# Altium PCB fairy_lights_button.PcbDoc
Units mil, origin at the board's own origin, x right, y up, seen from the top; angles counter-clockwise.
Board outline 800 x 1400 mil, 2 copper layers (L1, L2), stack 62.8 mil thick; 22 components, 13 nets, 52 pads, 27 vias.
Unrouted connection lines stored in the file: 1.
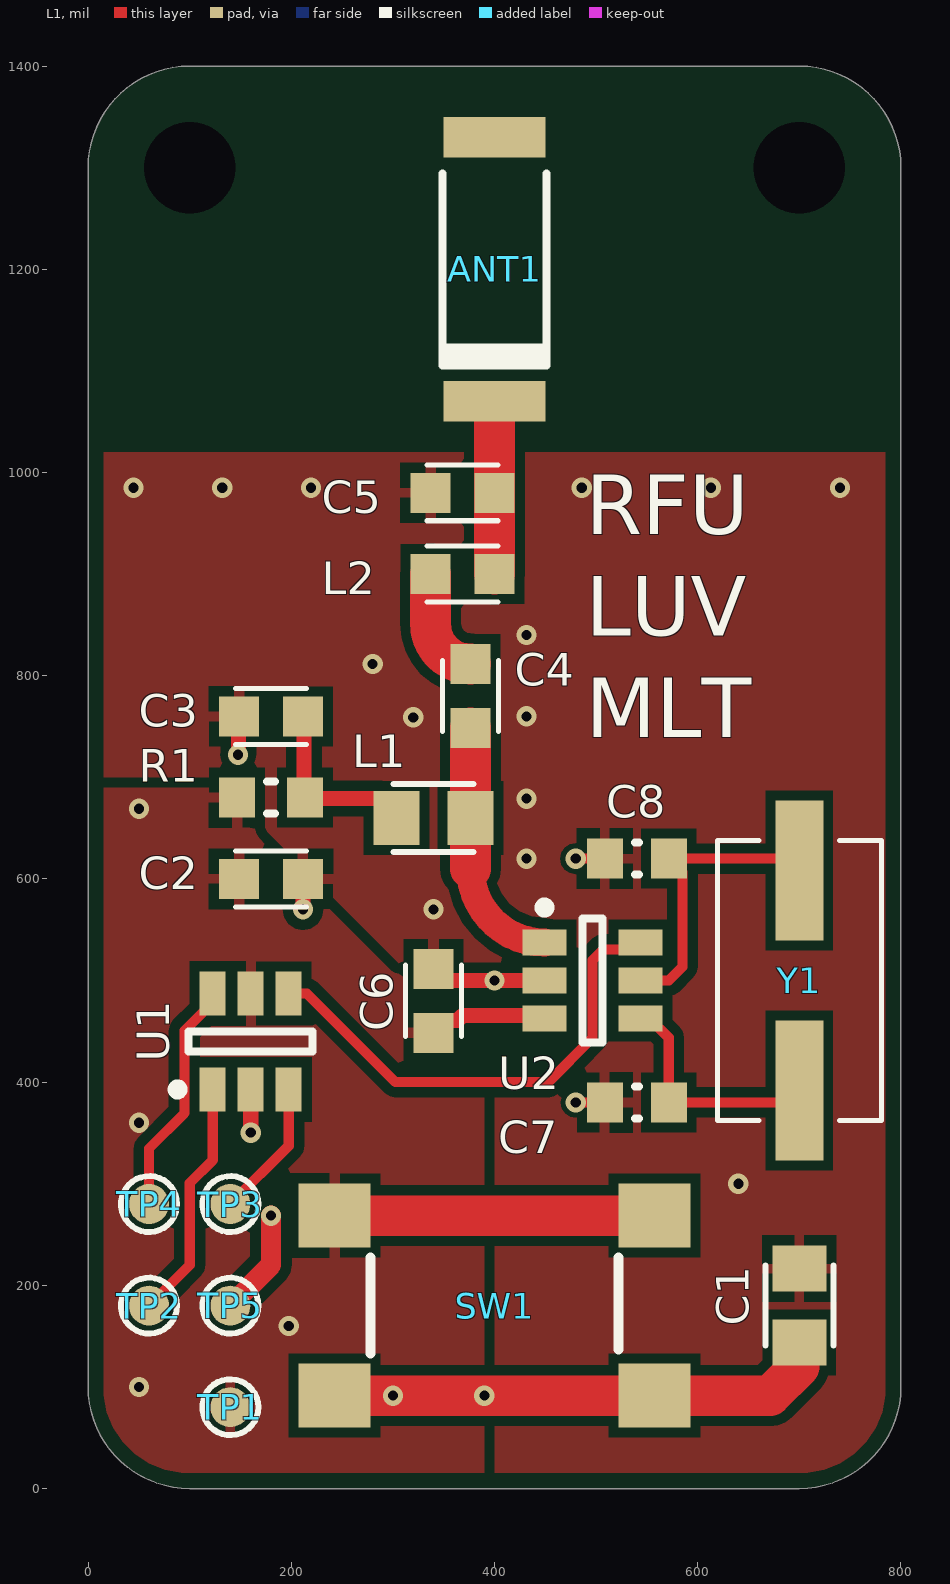
[diagram p0: L1 view]
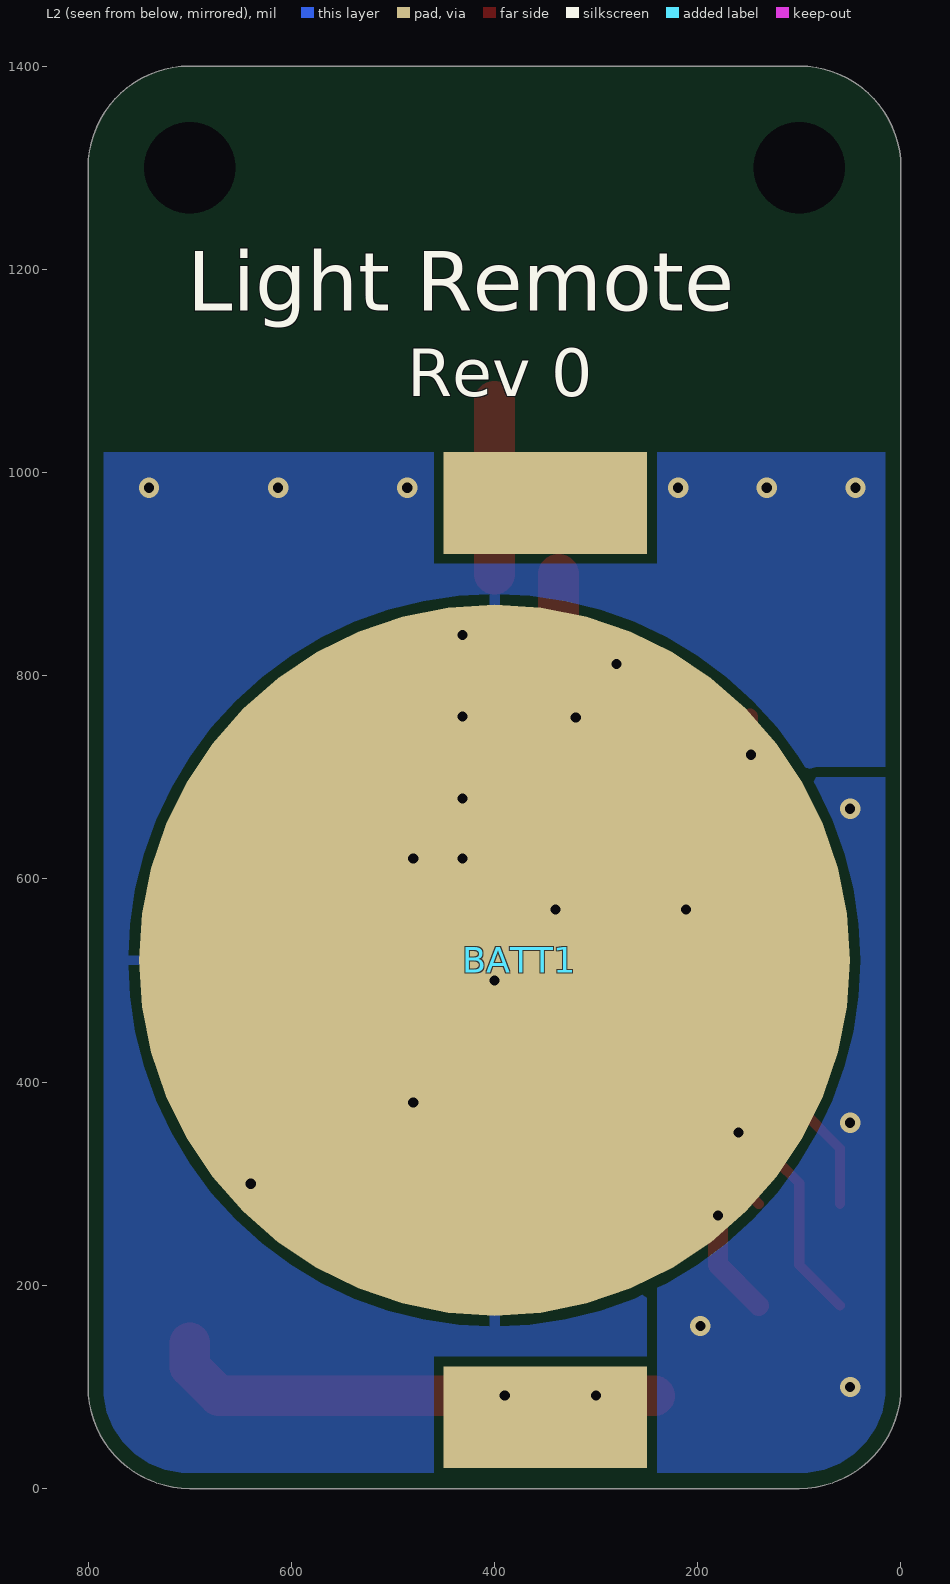
[diagram p1: L2 view, seen from below]
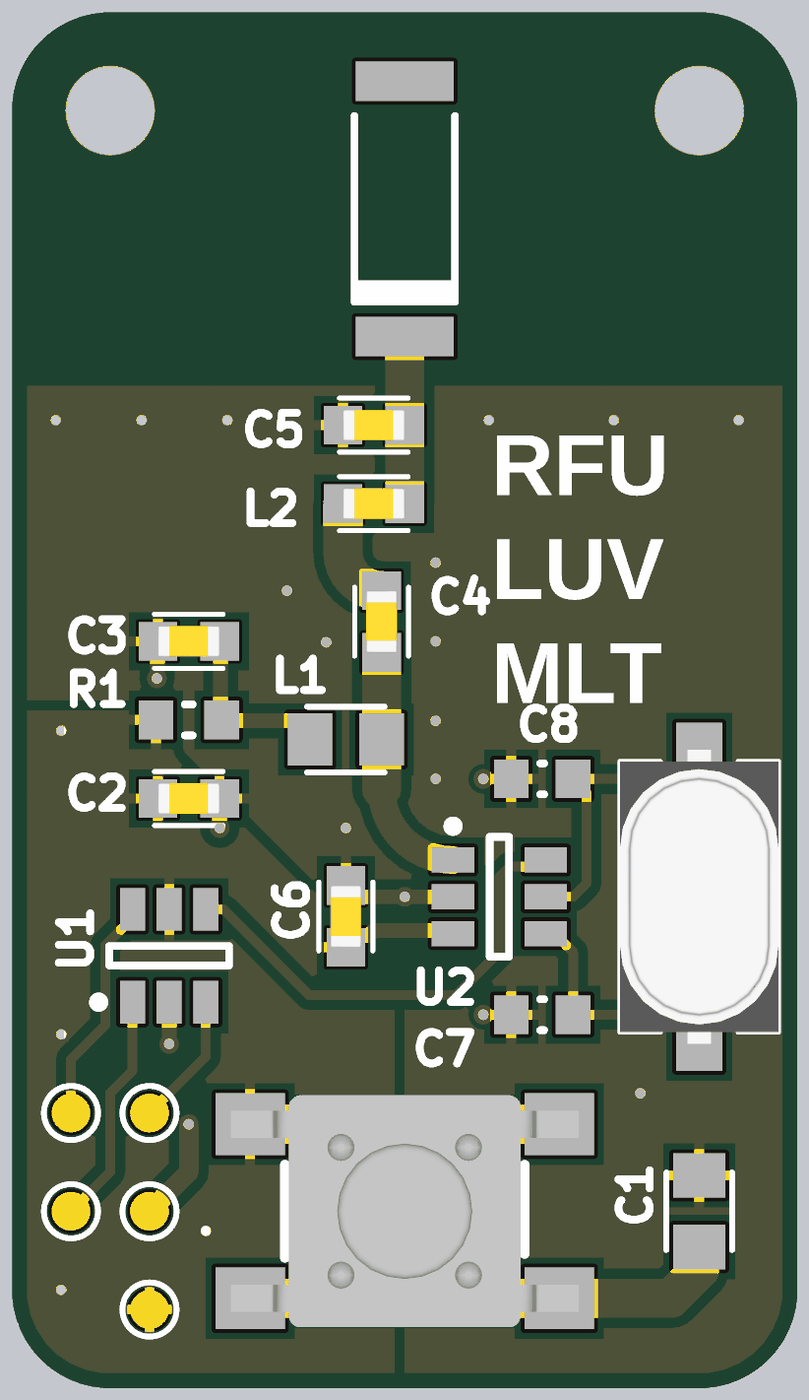
[diagram p2: 3D render of the assembled board from above, using the file's embedded part models]

## Layer stack, top to bottom
Top Solder: solder mask 0.1, Solder Resist, Dk 1
L1: signal copper 1.4
Core: dielectric 60, FR-4, Dk 4.6
L2: signal copper 1.4
Bottom Solder: solder mask 0.1, Solder Resist, Dk 1

## Board outline
100,0 cw(c100,100) 0,100 0,1300 cw(c100,1300) 100,1400 700,1400 cw(c700,1300) 800,1300 800,100 cw(c700,100) 700,0

## Design rules (kind name [scope] priority, off if disabled: settings)
BoardOutlineClearance [All] p1: gap=15 ignorepadtopadclearanceinfootprint=FALSE
Clearance [All] p1: gap=10 ignorepadtopadclearanceinfootprint=FALSE except(0: Arc-Hole Track-Hole SMDPad-Hole THPad-Hole Via-Hole Fill-Hole Poly-Hole Region-Hole Text-Hole)
PolygonConnect PolygonConnect_Via [All vs isVia] p1: connectstyle=Direct reliefconductorwidth=10 reliefentries=4 polygonreliefangle="90 Angle" airgapwidth=10
PolygonConnect [All] p2: connectstyle=Relief reliefconductorwidth=10 reliefentries=4 polygonreliefangle="90 Angle" airgapwidth=10
RoutingVias [All] p1: holewidth=10 width=20 viastyle="Through Hole" minholewidth=10 minwidth=20 maxholewidth=28 maxwidth=50
SolderMaskExpansion [All] p1: expansion=4
Width [All] p1: maxlimit=100 minlimit=10 preferedwidth=10 minimp=50.000000 maximp=50.000000 favimp=50.000000
30 further rules are at their usual default settings.

## Components (designator, comment, footprint, x,y, rotation, side; value= is the part's Value field where it differs from the comment)
ANT1 "CHIP ANTENNA" ANT-2.4-CHP 400,1200 r90 top locked
BATT1 "BAT-HLD-001" BAT-HLD-001_BAT-HLD-001(Primary) 350,520 r270 bottom locked
C1 "10uF" CAP_0805 700,180 r90 top
C2 "100nF" CAP_0603 180,600 r0 top
C3 "4.7uF" CAP_0603 180,760 r0 top
C4 "12pF" CAP_0603 376.42,780 r90 top
C5 "4.7pF" CAP_0603 368.5,980 r180 top
C6 "100nF" CAP_0603 340,480 r90 top
C7 "18pF" CAPC0603(1608)100_N 540,380 r180 top
C8 "18pF" CAPC0603(1608)100_N 540,620 r180 top
L1 "LQW21HNR82J00L" CAP_0805 340,660 r180 top
L2 "LQW18AN68NJ00D" CAP_0603 368.5,900 r0 top
R1 "0" RES_0603 180,680 r180 top
SW1 "PTS645SK50SMTR92 LFS" SWITCH_TACTILE_6MM 400,180 r180 top locked
TP1 "TESTPOINT" PAD_40MIL 140,80 r0 top
TP2 "TESTPOINT" PAD_40MIL 60,180 r90 top
TP3 "TESTPOINT" PAD_40MIL 140,280 r90 top
TP4 "TESTPOINT" PAD_40MIL 60,280 r90 top
TP5 "TESTPOINT" PAD_40MIL 140,180 r90 top
U1 "PIC10F202T-E/OT" SOT-23-OT6_N 160,440 r90 top
U2 "MICRF113YM6-TR" SOT-23-OT6_N 496.42,500 r0 top
Y1 "ECS-135.6-20-3X-TR" XTAL_ECS-135.6-20-3X-TR 700,500 r90 top

## Footprints (in the part's own frame and the unit in brackets; to place one, negate y for a bottom-side part, rotate by r counter-clockwise, add the part's x,y. Pads: shape width x height; smd on the part's side, far side on the other; paste and mask are expansions set on the pad)
ANT-2.4-CHP [mil] "SM Antenna, 2-Lead, Body 6.5x2.2x1.0mm"
  rect 40x100 smd: 1(-130,0) 2(130,0)
  silkscreen extent -94,-51 94,51, body extent -130,-45 130,45, height 40
BAT-HLD-001_BAT-HLD-001(Primary) [mil]
  round 700 smd: NEG(0,-50)
  rect 100x200 smd: POS1(-450,0) POS2(450,0)
  body extent -450,-305 450,305, height 170
CAP_0603 [mm]
  rect 1x1 smd mask+0.076: 1(-0.8,0) 2(0.8,0)
  silkscreen extent -0.89,-0.7 0.89,0.7, body extent -0.8,-0.4 0.8,0.4, height 0.86
CAP_0805 [mm] "Chip Capacitor, 2-Leads, Body 2.00x0.94mm, IPC Medium Density"
  rect 1.15x1.35 smd: 1(-0.925,0) 2(0.925,0)
  silkscreen extent -1,-0.85 1,0.85, body extent -1.07,-0.66 1.08,0.66, height 0.65
CAPC0603(1608)100_N [mm] "Chip Capacitor, Body 1.6x0.8mm, Height 1.0mm, IPC Medium Density"
  rect 0.9x1 smd: 1(-0.8,0) 2(0.8,0)
  silkscreen extent -0.05,-0.4 0.05,0.4, body extent -0.87,-0.48 0.88,0.47, height 1
PAD_40MIL [mm]
  round 1 smd paste-4 mask+0.076: 1(0,0)
  silkscreen extent -0.7,-0.7 0.7,0.7
RES_0603 [mm] "Chip Resistor, 2-Leads, Body 1.60x0.82mm, IPC Medium Density"
  rect 0.9x1 smd: 1(-0.85,0) 2(0.85,0)
  silkscreen extent -0.1,-0.4 0.1,0.4, body extent -0.85,-0.48 0.85,0.47, height 0.6
SOT-23-OT6_N [mm] "SOT23, 6-Leads, Body 2.9x1.7mm, Pitch 0.95mm, Lead Span 2.8mm, IPC Medium Density"
  rect 1.1x0.65 smd: 1(-1.2,0.95) 2(-1.2,0) 3(-1.2,-0.95) 4(1.2,-0.95) 5(1.2,0) 6(1.2,0.95)
  silkscreen extent -1.32,-1.55 0.25,1.95, body extent -0.9,-1.55 0.9,1.55, height 1.45
SWITCH_TACTILE_6MM [mm] "Switch, Pushbutton, Tactile, 6mm, Surface Mount"
  rect 1.8x1.6 smd: 1(-4,2.25) 2(4,2.25) 3(-4,-2.25) 4(4,-2.25)
  silkscreen extent -3.1,-1.2 3.1,1.2, body extent -4.5,-3 4.5,3, height 5
XTAL_ECS-135.6-20-3X-TR [mm]
  rect 3.5x1.2 smd: 1(-2.75,0) 2(2.75,0)
  silkscreen extent -3.5,-2.05 3.5,2.05, body extent -3.8,-2.05 3.8,2.05, height 2.3

## Part data
ANT1: "Two terminal chip antenna"
BATT1: "CR2032 Phosphor Bronze / Nickel Plated 20 mm Cell Size Battery Holder"
C1 C2 C3 C4 C5 C6 C7 C8: "Capacitor"
  C1: Capacitance=10uF
  C2 C6: Capacitance=100nF
  C3: Capacitance=4.7uF
  C4: Capacitance=12pF
  C5: Capacitance=4.7pF
  C7 C8: Capacitance=18pF
L1: library part INDUCTOR, Inductance=680nH
L2: library part INDUCTOR, Inductance=68nH
R1: "Resistor", Resistance=0
SW1: library part PUSHBUTTON-SPST-4Term, "SPST pushbutton - four terminal"
TP1 TP2 TP3 TP4 TP5: "Test Point", Part Number="TestPoint SMT 40mil"
U1: library part PIC10F202T, "8-bit Flash Microcontroller, 512 (x12-Bit words) Program Memory, 24 Bytes Data Memory, 6-Pin SOT-23"
U2: "RF Transmitter ASK 300MHz ~ 450MHz 10dBm 10 kbps PCB, Surface Mount Antenna SOT-23-6"
Y1: library part CRYSTAL, Frequency=13.5600MHZ, ComponentLink1Description="Manufacturer URL", ComponentLink1URL=http://www.abracon.com/, ComponentLink2Description=Datasheet, ComponentLink2URL=http://www.abracon.com/Resonators/ABLS2.pdf

## Free pads (board coordinates)
  round 0 hole 90: ""(100,1300) ""(700,1300)

## Via types
v1: diameter 20, hole 10, L1 to L2, tented both sides, 27 vias

## Nets (pads, with @x,y where several pads share a name; then routed paths per layer and width w, separated by ;. In a path a pad name is that pad's centre, name@x,y a point inside that pad or via, vN(x,y) a via of type N, cw(c..) or ccw(c..) an arc to the next point about the centre after c; other vN are vias at no path point)
ASK_OUT: U1.4 U2.6 | length 484.1
  L1 w10: U1.4 215.35,487.24 302.6,400 452.8,400 496.42,443.62 496.42,520 507.01,530.59 536.85,530.59 U2.6
BATT: C2.1 C6.1 R1.2 SW1.3 SW1.4 TP1.1 U1.5 U2.3 | length 435.2
  L1 w15: R1.2 R1.2@147.52,679.02 ; C2.1@147.52,600.98 C2.1 ; C6.1 352.19,460.69 363.64,460.69 368.5,465.55 446.22,465.55 U2.3
  L1 w40: SW1.4 SW1.3
  other v1: 50,100 197.4,160 50,360 50,669.02
GND: BATT1.NEG C1.2 C2.2 C3.1 C5.2 C6.2 C7.2 C8.2 TP5.1 U1.2 U2.2 | length 369.8
  L1 w10: v1(480,380) C7.2 ; v1(480,620) C8.2
  L1 w15: v1(147.52,722.2) 148.01,722.69 148.01,759.51 C3.1 ; v1(160,350.32) U1.2 ; v1(211.5,570) C2.2 ; C6.2@352.19,500 U2.2
  L1 w20: TP5.1 180,220 v1(180,268.58)
  other v1: 640,300 400,500 340,570 431.5,620 431.5,679.02 320,759.02 431.5,760 280,811.5 431.5,840 44.71,985 132,985 219.3,985 485.83,985 612.98,985 740.12,985
NetANT1_1: ANT1.1 C5.1 L2.2 | length 170
  L1 w40: L2.2 C5.1 ANT1.1
NetBATT1_POS1: BATT1.POS1 BATT1.POS2 C1.1 SW1.1 SW1.2 | length 492.9
  L1 w40: SW1.2 SW1.1 671.42,91.42 700,120 C1.1
  other v1: 300,91.42 390,91.42
NetC3_2: C3.2 L1.2 R1.1 | length 181.5
  L1 w15: C3.2 212.48,759.02 212.48,680.98 R1.1 214.39,679.07 288.44,679.07 303.58,663.94 L1.2
NetC4_1: C4.1 L1.1 U2.1 | length 252.6
  L1 w28: 376.42,610.16 ccw(c449.17,610.16) U2.1
  L1 w40: 376.42,610.16 L1.1 C4.1
NetC4_2: C4.2 L2.1 | length 111
  L1 w40: L2.1 337.01,850.91 ccw(c376.42,850.91) C4.2
NetC7_1: C7.1 U2.4 Y1.1 | length 227.8
  L1 w10: U2.4 552.52,462.6 571.5,443.62 C7.1 Y1.1@700,380
NetC8_1: C8.1 U2.5 Y1.2 | length 287.5
  L1 w10: U2.5 571.5,500 585,513.5 585,606.5 C8.1 Y1.2@700,620
NetTP2_1: TP2.1 U1.1 | length 238.7
  L1 w10: TP2.1 100,220 100,300.65 122.6,323.25 U1.1
NetTP3_1: TP3.1 U1.3 | length 136.5
  L1 w10: TP3.1 197.4,337.4 U1.3
NetTP4_1: TP4.1 U1.6 | length 233.2
  L1 w10: TP4.1 60,334.64 94.8,369.45 94.8,450.59 122.6,478.39 U1.6
pads on no net: ANT1.2

## Polygon pours and split planes (outlines as drawn)
BATT on L1 "L1-BATT" (solid, pour order 2): 0,700 122.6,700 400,422.6 400,0 0,0
GND on L1 "L1-GND" (solid, pour order 0): 800,1020 0,1020 0,700 122.6,700 400,422.6 400,0 800,0
BATT on L2 "L2-BATT" (solid, pour order 6): 0,700 122.6,700 240,582.6 240,0 0,0
GND on L2 "L2-GND" (solid, pour order 7): 0,1020 800,1020 800,0 240,0 240,545.57 85.57,700 0,700

## Silkscreen, mask and mechanical layers (free items; w line width, h text height)
Top Overlay:
  text "RFU / LUV / MLT" at 490,720 h100
Bottom Overlay:
  text "Light Remote" at 702.67,1140 h100
  text "Rev 0" at 485.74,1060 h80
Top Solder:
  text "RFU / LUV / MLT" at 490,720 h100
Mechanical 16 (Mech16):
  lines w10: 0,1300 cw(c100,1300) 100,1400 ; 0,1314.64 0,100 ccw(c100,100) 100,0 700,0 ccw(c700,100) 800,100 800,1314.64 ; 85.36,1400 715.36,1400 ; 700,1400 cw(c700,1300) 800,1300